# Altium PCB 7-seg-thermometer-basic.PcbDoc
Units mil, origin at the board's own origin, x right, y up, seen from the top; angles counter-clockwise.
Board outline 3385.83 x 866.14 mil, 2 copper layers (Top Layer, Bottom Layer); 36 components, 15 nets, 113 pads, 133 vias.
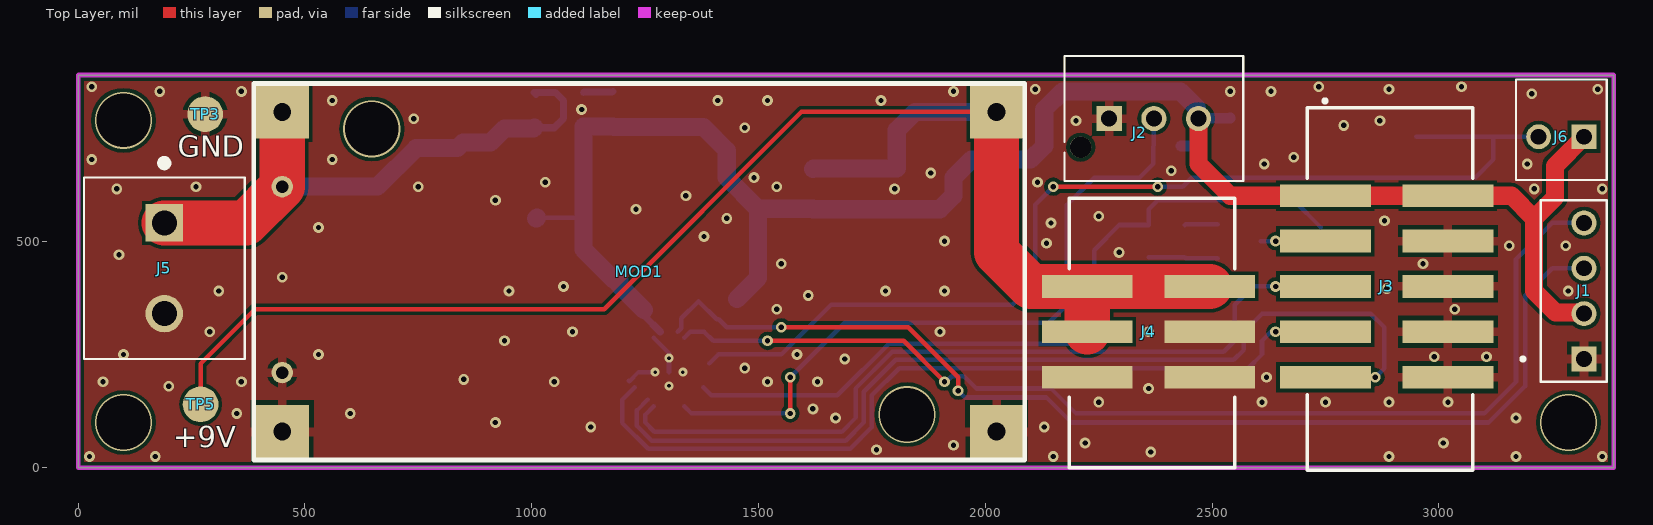
[diagram p0: Top Layer view]
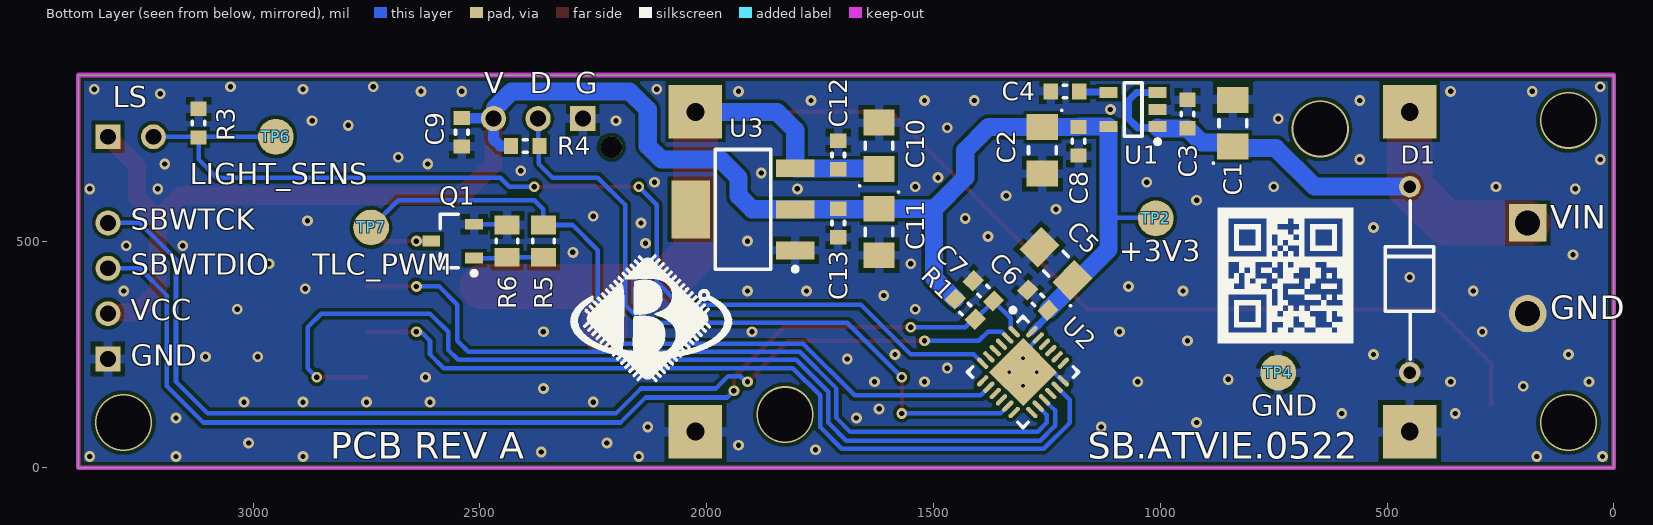
[diagram p1: Bottom Layer view, seen from below]
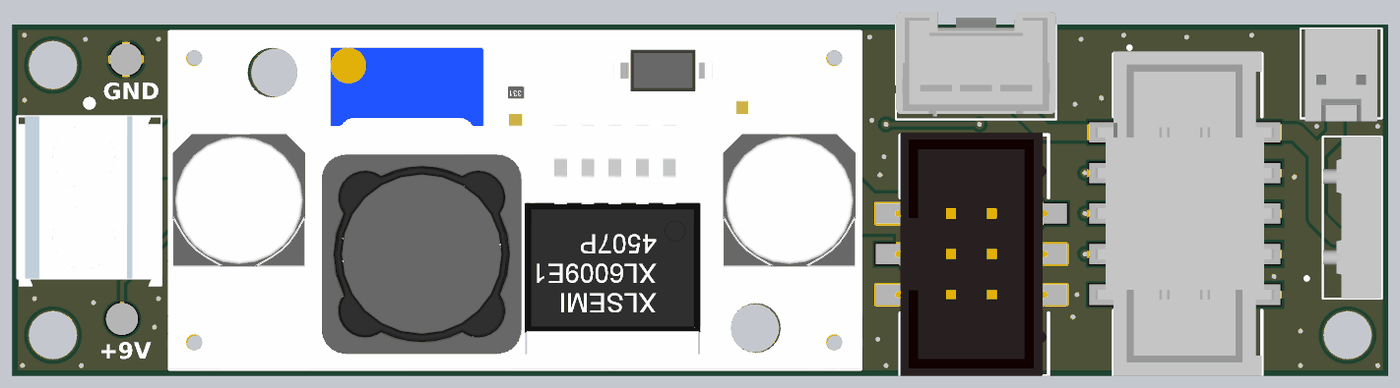
[diagram p2: 3D render of the assembled board from above, using the file's embedded part models]

## Layer stack, top to bottom
Top Solder: solder mask 0.4, Solder Resist, Dk 3.5
Top Layer: signal copper 1.4
Dielectric 1: dielectric 12.6, FR-4, Dk 4.8
Bottom Layer: signal copper 1.4
Bottom Solder: solder mask 0.4, Solder Resist, Dk 3.5

## Board outline
0,0 0,866.14 3385.83,866.14 3385.83,0

## Design rules (kind name [scope] priority, off if disabled: settings)
BoardOutlineClearance [All] p1: gap=7.87 ignorepadtopadclearanceinfootprint=FALSE except(15.75: Arc-SplitBarrior Arc-SplitContinuation Track-SplitBarrior Track-SplitContinuation SMDPad-SplitBarrior SMDPad-SplitContinuation THPad-SplitBarrior THPad-SplitContinuation Via-SplitBarrior Via-SplitContinuation Fill-SplitBarrior Fill-SplitContinuation Poly-SplitBarrior Poly-SplitContinuation Region-SplitBarrior Region-SplitContinuation Text-SplitBarrior Text-SplitContinuation)
Clearance "Clearance Bottom Layer" [OnLayer('Bottom Layer')] p1: gap=8 ignorepadtopadclearanceinfootprint=TRUE except(10: Arc-Text Track-Text SMDPad-Text THPad-Text Via-Text Fill-Text Poly-Text Region-Text Text-Text)
Clearance "Clearance Top Layer" [OnLayer('Top Layer')] p2: gap=8 ignorepadtopadclearanceinfootprint=TRUE except(10: Arc-Text Track-Text SMDPad-Text THPad-Text Via-Text Fill-Text Poly-Text Region-Text Text-Text)
Clearance [All] p3: gap=7.87 ignorepadtopadclearanceinfootprint=FALSE except(3.5: Arc-Arc Arc-Track Arc-SMDPad Track-Track Track-SMDPad SMDPad-SMDPad; 5: Arc-Via Track-Via SMDPad-Via THPad-Via Via-Via; 10: Arc-Text Track-Text SMDPad-Text THPad-Text Via-Text Fill-Text Poly-Text Region-Text Text-Text)
HoleSize [All] p1: absolutevalues=TRUE maxlimit=248.03 minlimit=7.87 maxpercent=80.000 minpercent=20.000
MinimumAnnularRing [All] p1: minimumring=3
MinimumSolderMaskSliver [All] p1: minsoldermaskwidth=3.94
PolygonConnect PolygonConnect_1 [All] p1: thpad.connectstyle=Relief thpad.reliefconductorwidth=20 thpad.reliefentries=4 thpad.polygonreliefangle="90 Angle" thpad.airgapwidth=10 smdpad.connectstyle=Relief smdpad.reliefconductorwidth=20 smdpad.reliefentries=4 smdpad.polygonreliefangle="90 Angle" smdpad.airgapwidth=10 via.connectstyle=Direct via.reliefconductorwidth=20 via.reliefentries=4 via.polygonreliefangle="90 Angle" via.airgapwidth=10
RoutingCorners [All] p1: cornerstyle=Round minsetback=100 maxsetback=100
RoutingVias [All] p1: holewidth=19.68 width=39.37 viastyle="Through Hole" minholewidth=7.87 minwidth=17.72 maxholewidth=39.37 maxwidth=78.74
SilkToSilkClearance [All] p1: silktosilkclearance=3.94
SilkToSolderMaskClearance [IsPad] p1: minsilkscreentomaskgap=3.94 clearancetoexposedcopper=TRUE
SolderMaskExpansion [All] p1: expansion=4
Width [All] p1: maxlimit=100 minlimit=3.5 preferedwidth=15
25 further rules are at their usual default settings.

## Components (designator, comment, footprint, x,y, rotation, side; value= is the part's Value field where it differs from the comment)
C1 "10uF/16V" "SMD 1206 POLARIZED" 840,760 r90 bottom
C2 "10uF/16V" "SMD 1206 POLARIZED" 1260,700 r270 bottom
C3 "100nF/16V" "SMD 0603 GENERIC" 940,780 r270 bottom
C4 "10nF/16V" "SMD 0603 GENERIC" 1210,830 r180 bottom
C5 "1uF/35V" "SMD 1206 POLARIZED" 1230,450 r45 bottom
C6 "100nF/16V" "SMD 0603 GENERIC" 1270,370 r225 bottom
C7 "1nF" "SMD 0603 GENERIC" 1390,390 r225 bottom
C8 "100nF/16V" "SMD 0603 GENERIC" 1180,720 r90 bottom
C9 "100nF/16V" "SMD 0603 GENERIC" 2540,740 r90 bottom
C10 "10uF/16V" "SMD 1206 POLARIZED" 1620,710 r90 bottom
C11 "10uF/16V" "SMD 1206 POLARIZED" 1620,520 r270 bottom
C12 "100nF/16V" "SMD 0603 GENERIC" 1710,690 r270 bottom
C13 "100nF/16V" "SMD 0603 GENERIC" 1710,540 r90 bottom
D1 "1N4007" "THT DO-41" 450,210 r90 bottom
J1 "SPY-BY-WIRE" "THT CON 4-PIN 2.54 WHITE" 3320,390 r90 top
J2 "CON THT TE 1744418-3 3-PIN 2.5" "THT CON TE 1744418-3 2.5" 2371.57,770 r0 top
J3 "CON SMD 10-PIN 2-ROW 2.54 WIDE" "SMD HEADER 2x5 2.54 WIDE" 2885,300 r270 top
J4 "CON SMD 6-PIN 2-ROW 2.54" "SMD HEADER 2x3 2.54" 2360,200 r270 top
J5 "TERMINAL BLOCK 2-PIN 5.08MM" "THT CON 2-PIN 5.08" 190,440 r270 top
J6 "CON THT 2-PIN 2.54 HEADER" "THT CON 2-PIN 2.54" 3270,730 r180 top
MOD1 "XL6009E1" "THT MOD XL6009E1" 387.4,17.4 r0 top
Q1 "BC817" SOT23-3 2560,500 r0 bottom
R1 "47K" "SMD 0603 GENERIC" 1430,350 r45 bottom
R3 "825K" "SMD 0603 GENERIC" 3120,760 r270 bottom
R4 "4K7" "SMD 0603 GENERIC" 2400,710 r0 bottom
R5 "2K2" "SMD 0805 GENERIC" 2360,500 r270 bottom
R6 "10K" "SMD 0805 GENERIC" 2440,500 r270 bottom
TP2 "TPT SMD 200" "SMD TP 2.0mm" 1010,550 r180 bottom
TP3 "TPT SMD 200" "SMD TP 2.0mm" 280,780 r0 top
TP4 "TPT SMD 200" "SMD TP 2.0mm" 740,210 r180 bottom
TP5 "TPT SMD 200" "SMD TP 2.0mm" 270,140 r0 top
TP6 "TPT SMD 200" "SMD TP 2.0mm" 2950,730 r180 bottom
TP7 "TPT SMD 200" "SMD TP 2.0mm" 2740,530 r180 bottom
U1 "TPS79333DBVR" SOT23-5 1060,790 r0 bottom
U2 "MSP430FR2433" VQFN-24 1302.67,211.25 r225 bottom
U3 "AMS1117-3.3" SOT-223 1920,570 r0 bottom

## Footprints (in the part's own frame and the unit in brackets; to place one, negate y for a bottom-side part, rotate by r counter-clockwise, add the part's x,y. Pads: shape width x height; smd on the part's side, far side on the other; paste and mask are expansions set on the pad)
"SMD 0603 GENERIC" [mm]
  rect 0.8x0.9 smd: 1(-0.8,0) 2(0.8,0)
  silkscreen extent -0.1,-0.35 0.1,0.35, body extent -0.85,-0.45 0.85,0.45, height 0.55
"SMD 0805 GENERIC" [mm]
  rect 1.05x1.4 smd: 1(-0.9,0) 2(0.9,0)
  silkscreen extent -0.1,-0.6 0.1,0.6, body extent -1.05,-0.7 1.05,0.7, height 0.6
"SMD 1206 POLARIZED" [mm] "BAUFORM A"
  rect 1.45x1.75 smd: 1(-1.3,0) 2(1.3,0)
  silkscreen extent -2.29,-0.77 0.2,1.14, body extent -1.65,-0.85 1.65,0.85, height 1.6
"SMD HEADER 2x3 2.54" [mil]
  rect 50x200 smd: 1(-200,-135) 2(-200,135) 3(-100,-135) 4(-100,135) 5(0,-135) 6(0,135)
  silkscreen extent -394,-175 200,190, body extent -400,-187 200,187, height 414
"SMD HEADER 2x5 2.54 WIDE" [mil]
  rect 50x200 smd: 1(-300,-135) 2(-300,135) 3(-200,-135) 4(-200,135) 5(-100,-135) 6(-100,135) 7(0,-135) 8(0,135) 9(100,-135) 10(100,135)
  silkscreen extent -513,-175 305,190, body extent -500,-220 300,220, height 450
"SMD TP 2.0mm" [mm]
  round 2 smd: 1(0,0)
SOT23-3 [mm]
  rect 1x0.6 smd: 1(-1.2,0.95) 2(-1.2,-0.95) 3(1.2,0)
  silkscreen extent -1.32,-1.5 0.7,1.92, body extent -1.15,-1.45 1.15,1.45, height 1.1
SOT23-5 [mm]
  rect 1x0.6 smd: 1(-1.375,0.95) 2(-1.375,0) 3(-1.375,-0.95) 4(1.375,-0.95) 5(1.375,0.95)
  silkscreen extent -1.5,-1.5 0.5,1.92, body extent -0.88,-1.5 0.87,1.5, height 1.45
SOT-223 [mm]
  rect 2.15x1 smd: 1(-2.925,2.3) 2(-2.925,0) 3(-2.925,-2.3)
  rect 2.15x3.25 smd: 4(2.925,0)
  silkscreen extent -3.05,-3.35 1.55,3.47, body extent -1.85,-3.35 1.85,3.35, height 1.8
"THT CON 2-PIN 2.54" [mm]
  rect 1.398x1.398 hole 0.89: 1(-1.27,0)
  round 1.398 hole 0.89: 2(1.27,0)
  silkscreen extent -2.54,-3.2 2.54,2.42, body extent -2.25,-3.2 2.25,2.6, height 11.75
"THT CON 2-PIN 5.08" [mm]
  rect 2.1x2.1 hole 1.4: 1(-2.54,0)
  round 2.1 hole 1.4: 2(2.54,0)
  silkscreen extent -6.09,-4.5 5.08,4.5, body extent -5.08,-4.43 5.58,4.57, height 15.2
"THT CON 4-PIN 2.54 WHITE" [mm]
  rect 1.398x1.398 hole 0.89: 1(-3.81,0)
  round 1.398 hole 0.89: 2(-1.27,0) 3(1.27,0) 4(3.81,0)
  silkscreen extent -5.08,-1.27 5.08,3.52, body extent -5.08,-1.25 5.08,2.4, height 9.5
"THT CON TE 1744418-3 2.5" [mm]
  rect 1.408x1.408 hole 0.9: 1(-2.5,0)
  round 1.408 hole 0.9: 2(0,0) 3(2.5,0)
  round 1.2 hole 1.2 unplated: ""(-4.1,-1.6)
  silkscreen extent -5,-3.5 5,3.5, body extent -5,-3.3 5,3.23, height 8.8
"THT DO-41" [mm]
  round 1.2 hole 0.7: A(0,0) K(10.414,0)
  silkscreen extent 0.76,-1.35 9.63,1.37, body extent -0.38,-0.98 10.79,1.02, height 2.5
"THT MOD XL6009E1" [mm]
  rect 3x3 hole 1: 1(1.59,19.492) 2(1.59,1.59) 3(41.59,19.492) 4(41.59,1.59)
  silkscreen extent 0,0 43.18,21.08, body extent -0.12,0 43.18,21.1, height 13.05
VQFN-24 [mm]
  oval 0.8x0.25 smd: 1(-1.95,1.25) 2(-1.95,0.75) 3(-1.95,0.25) 4(-1.95,-0.25) 5(-1.95,-0.75) 6(-1.95,-1.25) 13(1.95,-1.25) 14(1.95,-0.75) 15(1.95,-0.25) 16(1.95,0.25) 17(1.95,0.75) 18(1.95,1.25)
  oval 0.25x0.8 smd: 7(-1.25,-1.95) 8(-0.75,-1.95) 9(-0.25,-1.95) 10(0.25,-1.95) 11(0.75,-1.95) 12(1.25,-1.95) 19(1.25,1.95) 20(0.75,1.95) 21(0.25,1.95) 22(-0.25,1.95) 23(-0.75,1.95) 24(-1.25,1.95)
  rect 2.7x2.7 smd: 25(0,0)
  silkscreen extent -2.97,-2.2 2.2,2.2, body extent -2.05,-2.05 2.05,2.05, height 1

## Part data
C1 C2 C10 C11: library part "CAP SMD TAN 10uF 16V 10% 1206"
C3 C6 C8 C9 C12 C13: library part "CAP SMD CER 100nF 16V 10% X7R 0603"
C4: library part "CAP SMD CER 10nF 16V 10% X7R 0603"
C5: library part "CAP SMD TAN 1uF 35V 10% 1206"
C7: library part "CAP SMD CER 1nF 16V 10% X7R 0603"
D1: library part "SEM GEN 1000V 1A DO-41 1N4007"
J1: library part "CON THT SPY-BY-WIRE 4-PIN 2.54"
J3: "HTST-105-01-SM-DV-P"
J5: library part "CON THT TERMINAL BLOCK  2-PIN 5.08", "282841-2"
MOD1: library part "MOD XL6009E1"
Q1: library part "SEM BJT NPN 45V 500mA BC817"
R1: library part "RES SMD 47K 1% 0603"
R3: library part "RES SMD 825K 1% 0603"
R4: library part "RES SMD 4K7 1% 0603"
R5: library part "RES SMD 2K2 1% 0805"
R6: library part "RES SMD 10K 1% 0805"
U1: library part "PWR TPS79333DBVR"
U2: library part "MCU MSP430FR2433IRGET"
U3: library part "PWR AMS1117-3.3 1A LDO"

## Via types
v1: diameter 23.62, hole 11.81, Top Layer to Bottom Layer, tented both sides, 124 vias
v2: diameter 125.98, hole 118.11, Top Layer to Bottom Layer, tented both sides, 5 vias
v3: diameter 19.68, hole 7.87, Top Layer to Bottom Layer, tented both sides, 4 vias

## Nets (pads, with @x,y where several pads share a name; then routed paths per layer and width w, separated by ;. In a path a pad name is that pad's centre, name@x,y a point inside that pad or via, vN(x,y) a via of type N, cw(c..) or ccw(c..) an arc to the next point about the centre after c; other vN are vias at no path point)
+3V3: C2.1 C5.1 C6.2 C8.2 C9.2 C11.1 C13.2 J1.2 J2.3 J3.1 J3.2 J6.1 R1.2 R4.2 TP2.1 U1.5 U2.24 U3.2 | length 4100.4
  Top Layer w40: J2.3 2470,670 2540,600 J3.1 J3.2 3160,600 3210,550 ; J1.2 3317.12,342.88 3257.12,342.88 3210,390 3210,550 ; J6.1 3255.91,665.91 3255.91,595.91 3210,550
  Bottom Layer w10: TP2.1@1011.4,551.4 1114.13,551.4 ; C6.2@1247.73,335.79 C6.2
  Bottom Layer w16: C6.2@1247.73,335.79 U2.24
  Bottom Layer w24: R4.2 2455.94,710 2470,724.06 J2.3 2470.75,770.75 2539.25,770.75 C9.2
  Bottom Layer w40: TP2.1 TP2.1@1011.4,551.4 ; C6.2 1247.73,347.81 1193.81,401.73 C5.1 1181.73,413.81 1114.13,481.4 U1.5 1178.9,752.6 C8.2 1259.69,751.5 C2.1 1378.82,751.18 1430,700 1430,640 1498.82,571.18 ; R1.2 1498.82,418.82 1498.82,571.18 ; J2.3 2467.05,772.95 2467.05,792.95 2430,830 2170,830 2130,790 2130,710 2100,680 1970,680 1930,640 1930,600 1900.31,570.31 1805.16,570.31 U3.2 1804.53,570.31 1710,570.31 1620.87,570.31 C11.1 1498.82,571.18
+5V: C1.1 C3.2 D1.K J5.1 MOD1.1 U1.1 U1.3 | length 1258
  Top Layer w100: J5.1 370,540 D1.K MOD1.1
  Bottom Layer w16: U1.1 1008.46,750 1050,750 1070,770 1070,810 1052.6,827.4 U1.3 U1.3@1009.68,823.59
  Bottom Layer w40: D1.K 660,620 745.55,705.55 836.73,705.55 C1.1 848.54,717.36 908.86,717.36 C3.2 1004.18,748.5 U1.1@1005.87,750.19
+9V: C10.1 C12.2 J4.1 J4.2 J4.3 MOD1.3 TP5.1 U3.3 | length 3491.9
  Top Layer w10: TP5.1 270,230 390,350 1160,350 1594.8,784.8 MOD1.3
  Top Layer w100: MOD1.3 2024.8,475.2 2100,400 J4.1 ; J4.3 J4.1 ; J4.2 J4.1
  Bottom Layer w40: C10.1 1621.42,660.24 1710,660.24 1804.53,660.24 U3.3 1804.84,744.84 1844.8,784.8 MOD1.3
GND: C1.2 C2.2 C3.1 C4.1 C5.2 C6.1 C7.1 C8.1 C9.1 C10.2 C11.2 C12.1 C13.1 D1.A J1.1 J2.1 J3.4 J3.6 J3.8 J3.10 J4.4 J4.5 J4.6 J5.2 MOD1.2 MOD1.4 Q1.2 R3.1 R6.1 TP3.1 TP4.1 U1.2 U2.18 U2.23 U2.25 U3.1 | length 230.1
  Bottom Layer w10: U2.18 1214.78,190.57 1235.46,211.25 v3(1272.05,211.25) ; U2.23 1302.67,253 v3(1302.67,241.87) U2.25 ; R6.1 2441.97,537.4 Q1.2
  other v1: 25,25 170,25 2150,25 2890,25 3170,25 3360,25 2365,35 1760,40 1930,50 2220,55 3010,55 1130,90 2130,90 920,100 1670,110 3170,110 350,120 600,120 1620,130 2250,145 2610,145 2750,145 2890,145 3020,145 2360,175 200,180 55,190 360,190 1050,190 1520,190 1630,190 850,195 2620,200 1470,220 1690,240 2990,245 3105,245 100,250 530,250 1585,250 940,280 290,300 1090,300 1900,300 2360,300 1540,350 3035,350 1610,380 310,390 950,390 1780,390 1910,390 3285,390 2885,395 1070,400 450,420 1550,450 2965,450 90,470 2295,475 3155,490 3280,490 2135,495 1910,500 1380,510 530,530 2145,540 2880,545 1430,550 2250,555 1230,570 920,590 1340,600 85,615 1800,615 3210,615 3360,615 260,620 750,620 1540,620 1030,630 2115,630 1490,640 1880,650 2410,655 2615,670 3195,670 30,680 560,680 2680,685 1470,750 2790,755 2200,765 2870,765 740,770 1110,790 560,810 1410,810 1520,810 1770,810 3205,825 180,830 360,830 1930,830 2540,830 2630,830 2110,835 2890,835 3350,835 30,840 2735,840 3050,840
  other v3: 1302.67,180.62 1333.3,211.25
LIGHT_SENS: J6.2 R3.2 TP6.1 U2.6 | length 2333.7
  Top Layer w10: v1(2150,620) v1(2380,620)
  Bottom Layer w10: U2.6 1391.87,230.73 1411.14,250 1550,250 1660,360 2060,360 2110,410 2110,580 v1(2150,620) ; v1(2380,620) 2435,620 2455,640 3080,640 3120,680 R3.2 ; TP6.1 3118.5,730 R3.2 ; J6.2 3121.5,730 R3.2
NetC4_2: C4.2 U1.4 | length 65.4
  Bottom Layer w16: U1.4 1115.43,828.7 1177.2,828.7 C4.2
NetC7_2: C7.2 J1.3 R1.1 U2.1 | length 2425
  Top Layer w10: v1(1550,310) 1830,310 1940,200 v1(1940,170)
  Bottom Layer w10: U2.1 1329.71,307.87 1329.71,329.71 C7.2 R1.1 1412.27,327.73 1430,310 v1(1550,310) ; v1(1940,170) 1954.81,155.19 2134.81,155.19 2190,100 3110,100 3190,180 3190,380 3250,440 J1.3
NetJ1_4: J1.4 U2.2 | length 2409.9
  Top Layer w10: v1(1520,280) 1820,280 v1(1910,190)
  Bottom Layer w10: U2.2 1336.19,286.41 1349.78,300 1380,300 1400,280 v1(1520,280) ; v1@1912.61,192.61 v1(1910,190) 1913.69,190 1925.69,202 1953,202 1980,175 2145,175 2200,120 3100,120 3170,190 3170,460 3250,540 J1.4
NetQ1_1: Q1.1 R5.2 R6.2 | length 153.6
  Bottom Layer w10: R5.2 R6.2 2441.97,462.6 Q1.1
ONE_WIRE: J2.2 R4.1 U2.11 | length 1553.5
  Top Layer w10: v1(1570,120) v1(1570,200)
  Bottom Layer w10: U2.11 1336.19,136.08 1352.27,120 v1(1570,120) ; v1(1570,200) 1690,320 2140,320 2180,360 2180,580 2240,640 2340,640 2370,670 2370,708.43 2371.57,710 J2.2 J2.2@2377.76,776.18
TLC_BLANK: J3.3 Q1.3 | length 142.8
  Top Layer w10: v1(2640,500) J3.3
  Bottom Layer w10: Q1.3 v1(2640,500)
TLC_CLK: J3.9 U2.15 | length 2148.2
  Top Layer w10: J3.9 v1(2860,200)
  Bottom Layer w10: U2.15 1232,126.65 1232,92.54 1264.54,60 1692,60 1732,100 1732,167.46 1802.54,238 2548,238 2570,260 2570,300 2610,340 2850,340 2880,310 2880,220 v1(2860,200)
TLC_LATCH: J3.5 U2.14 | length 1769.8
  Top Layer w10: v1(2640,400) J3.5
  Bottom Layer w10: U2.14 1269.27,135.97 1250,116.7 1250,100 1270,80 1684,80 1714,110 1714,174.91 1795.09,256 2526,256 2550,280 2550,360 2590,400 v1(2640,400)
TLC_MOSI: J3.7 U2.17 | length 1829.2
  Top Layer w10: v1(2640,300) J3.7
  Bottom Layer w10: U2.17 1200,150.33 1200,99.09 1257.09,42 1702,42 1750,90 1750,160 1810,220 2580,220 2610,250 2610,280 2630,300 v1(2640,300)
TLC_PWM: R5.1 TP7.1 U2.8 | length 1686.5
  Bottom Layer w10: U2.8 1377.95,177.84 1395.79,160 1673.63,160 1787.63,274 2194,274 2240,320 2240,480 2295.43,535.43 R5.1 2360,570 2380,590 2680,590 TP7.1
pads on no net: J2. U2.3 U2.4 U2.5 U2.7 U2.9 U2.10 U2.12 U2.13 U2.16 U2.19 U2.20 U2.21 U2.22 U3.4
copper on no net:
  other v2: 100,100 3285.83,100 1827.4,117.4 647.4,747.4 100,766.14

## Polygon pours and split planes (outlines as drawn)
GND on Top Layer (solid, pour order 0): 0,866.14 3385.83,866.14 3385.83,0 0,0
GND on Bottom Layer (solid, pour order 2): 0,866.14 3385.83,866.14 3385.83,0 0,0

## Keep-outs
Keep-Out Layer:
  the board outline again, w10

## Silkscreen, mask and mechanical layers (free items; w line width, h text height)
Top Overlay:
  text "GND" at 220,670 h80
  text "+9V" at 210,30 h80
Bottom Overlay:
  drawing of 13654 lines, arcs and shapes, not listed
  text "G" at 2290,810 h80
  text "D" at 2390,810 h80
  text "V" at 2490,810 h80
  text "LS" at 3310,780 h80
  text "LIGHT_SENS" at 3140,610 h80
  text "VIN" at 140,510 h90
  text "SBWTCK" at 3270,510 h80
  text "+3V3" at 1090,440 h80
  text "TLC_PWM" at 2870,410 h80
  text "SBWTDIO" at 3270,410 h80
  text "GND" at 140,310 h90
  text "VCC" at 3270,310 h80
  text "GND" at 3270,210 h80
  text "GND" at 800,100 h80
  text "SB.ATVIE.0522" at 1160,0 h100
  text "PCB REV A" at 2830,0 h100